# EAGLE board relay (EAGLE 9.6.2)
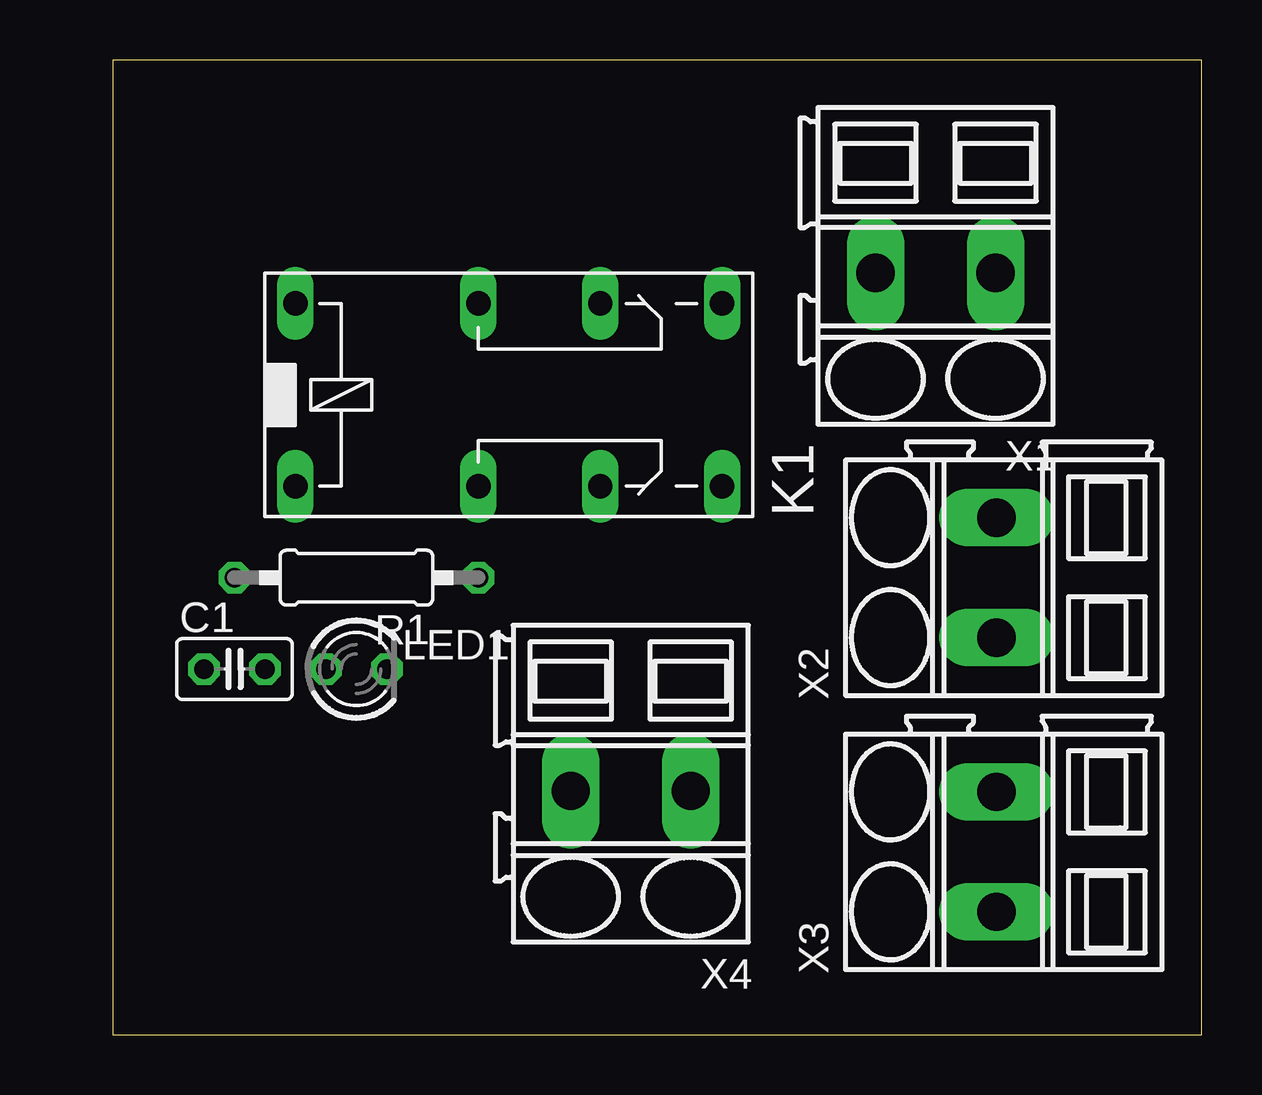
[diagram p0: board, top side]
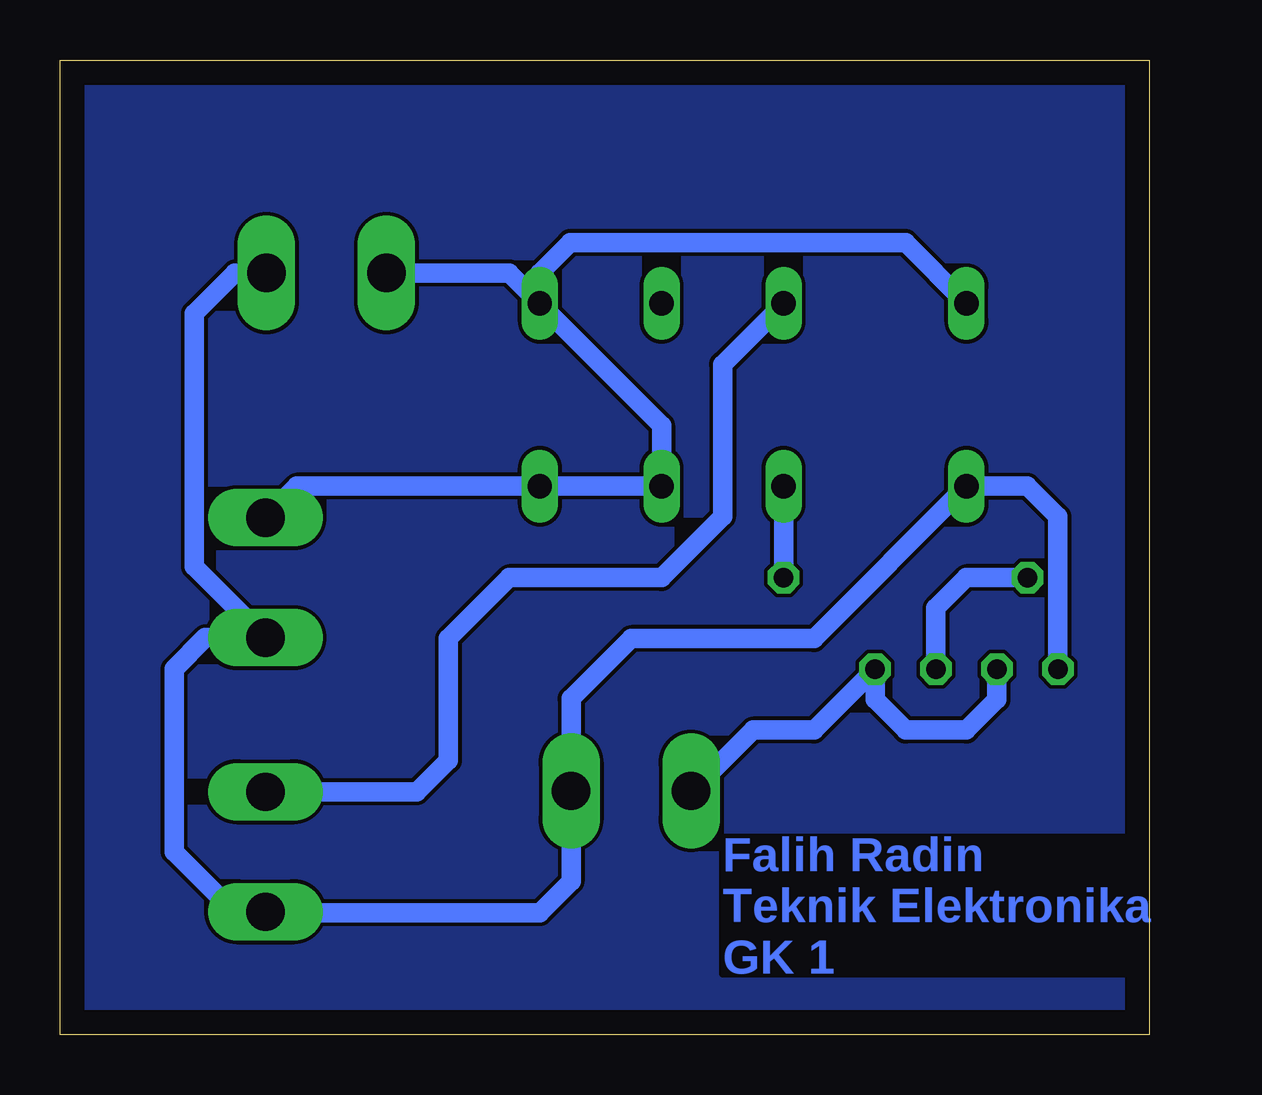
[diagram p1: board, bottom side, seen from below]

Size 45.39 x 40.63 mm. Coordinates in mm from the lower left corner, seen from the top.
Outline: 0,0 45.39,0 45.39,40.63 0,40.63 0,0
Copper layers (1*16): Top 0.035mm / dielectric 1.5mm / Bottom 0.035mm
Design rules "default": minimum track width 6mil, minimum drill 0.35mm, track to track 6mil, track to pad 6mil, pad to pad 6mil, via to via 6mil, smd to smd 6mil, copper to edge 40mil, drill to drill 6mil, minimum pad ring 10mil, minimum via ring 8mil, stop-mask expansion 4mil, vias tented up to drill 0mil, thermal gap 10mil

## Footprints (pad centres in the part's own frame; a part is rotated, then mirrored left to right if it is on the bottom)
C025-025X050 = drill 0.813 octagon: 1 -1.27,0; 2 1.27,0
351 = drill 1.016 long: 1 -3.81,-3.81; 16 -3.81,3.81; O1 8.89,-3.81; O2 8.89,3.81; P1 3.81,-3.81; P2 3.81,3.81; S1 13.97,-3.81; S2 13.97,3.81
LED3MM = drill 0.813 octagon: A -1.27,0; K 1.27,0
0207/10 = drill 0.813 octagon: 1 -5.08,0; 2 5.08,0
SMKDSP_1,5/2 = drill 1.6 pad 1.8 long: 1 -2.5,0; 2 2.5,0

## Placement (x,y rotation side)
C1  [C025-025X050]  5.08,15.24 0 top
K1  351  [351]  11.43,26.67 0 top
LED1  [LED3MM]  10.16,15.24 0 top
R1  [0207/10]  10.16,19.05 180 top
X1  SMKDSP_1,5/2  [SMKDSP_1,5/2]  34.29,31.75 180 top
X2  SMKDSP_1,5/2  [SMKDSP_1,5/2]  36.83,19.05 90 top
X3  SMKDSP_1,5/2  [SMKDSP_1,5/2]  36.83,7.62 90 top
X4  SMKDSP_1,5/2  [SMKDSP_1,5/2]  21.59,10.16 180 top

## Library data of the parts
C1 = rcl; SPICEPREFIX: C
K1 = relay; OC_FARNELL: unknown; OC_NEWARK: unknown
LED1 = led
R1 = rcl; SPICEPREFIX: R
X1-X4 = con-phoenix-smkdsp; MF: FARNELL; MPN: 1733570; OC_FARNELL: 3041244; OC_NEWARK: 69C8588

## Nets
GND: C1.1 K1.1 X1.1 X2.1 X3.1 X4.1
N$1: K1.P1 R1.1
N$2: LED1.A R1.2
O1: K1.16 K1.O1 K1.S1 K1.S2 X1.2 X2.2
P2: K1.P2 X3.2
VOUT: C1.2 LED1.K X4.2

## Tracks (layer width: path | path; a pad name or v marks a point on that pad's centre or on a via)
GND
  Bottom 0.813: C1.1 3.81,21.59 5.08,22.86 K1.1 13.97,16.51 21.59,16.51 24.09,14.01 X4.1 24.09,6.39 25.4,5.08 36.79,5.08 X3.1 38.14,5.12 40.64,7.62 40.64,15.24 39.33,16.55 X2.1 39.79,19.51 39.79,30.06 38.1,31.75 X1.1
N$1
  Bottom 0.813: R1.1 K1.P1
N$2
  Bottom 0.813: R1.2 7.62,19.05 8.89,17.78 LED1.A
O1
  Bottom 0.813: X2.2 35.52,22.86 K1.S1 K1.O1 20.32,25.4 K1.S2 | K1.16 10.16,33.02 24.13,33.02 25.4,31.75 K1.S2 | K1.S2 26.67,31.75 X1.2
P2
  Bottom 0.813: K1.P2 17.78,27.94 17.78,21.59 20.32,19.05 26.67,19.05 29.21,16.51 29.21,11.43 30.52,10.12 X3.2
VOUT
  Bottom 0.813: C1.2 6.35,13.97 7.62,12.7 10.16,12.7 11.43,13.97 LED1.K 13.97,12.7 16.51,12.7 19.05,10.16 X4.2
YY
  pour Bottom: 0,40.64 45.72,40.64 45.72,0 0,0

## Text on the board
Bottom: Falih Radin / Teknik Elektronika / GK 1